# Altium PCB ICAN-7006-MCU.PcbDoc
Units mm, origin at the board's own origin, x right, y up, seen from the top; angles counter-clockwise.
Board outline 150 x 80 mm, 2 copper layers (Top Layer, Bottom Layer); 53 components, 193 nets, 552 pads, 0 vias.
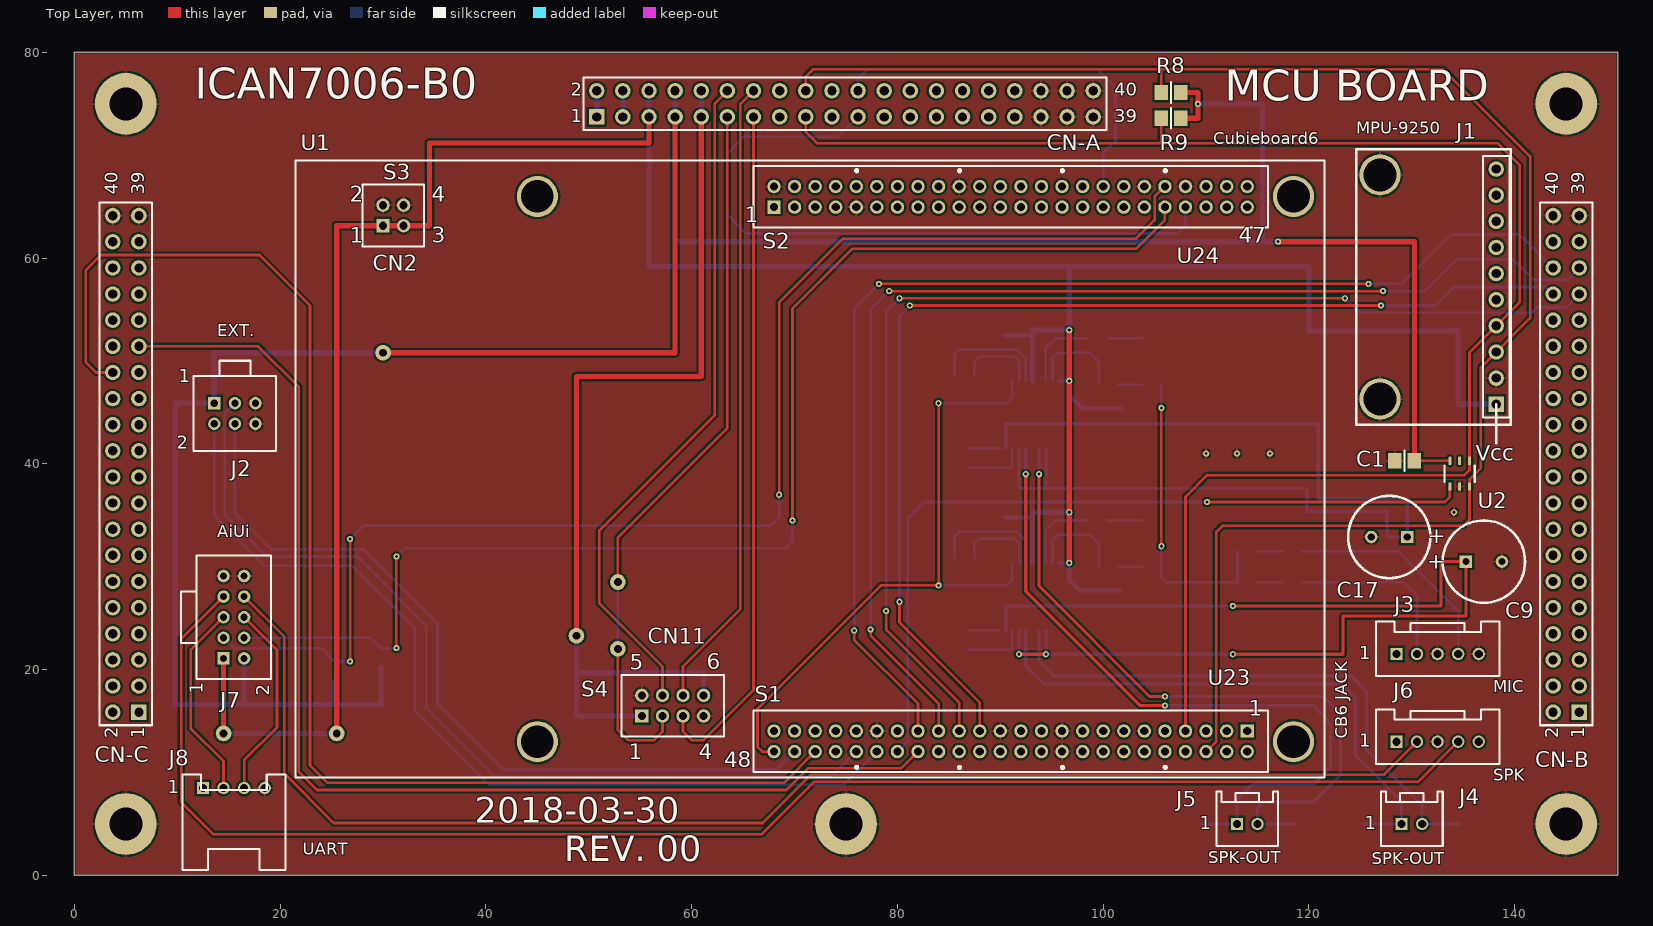
[diagram p0: Top Layer view]
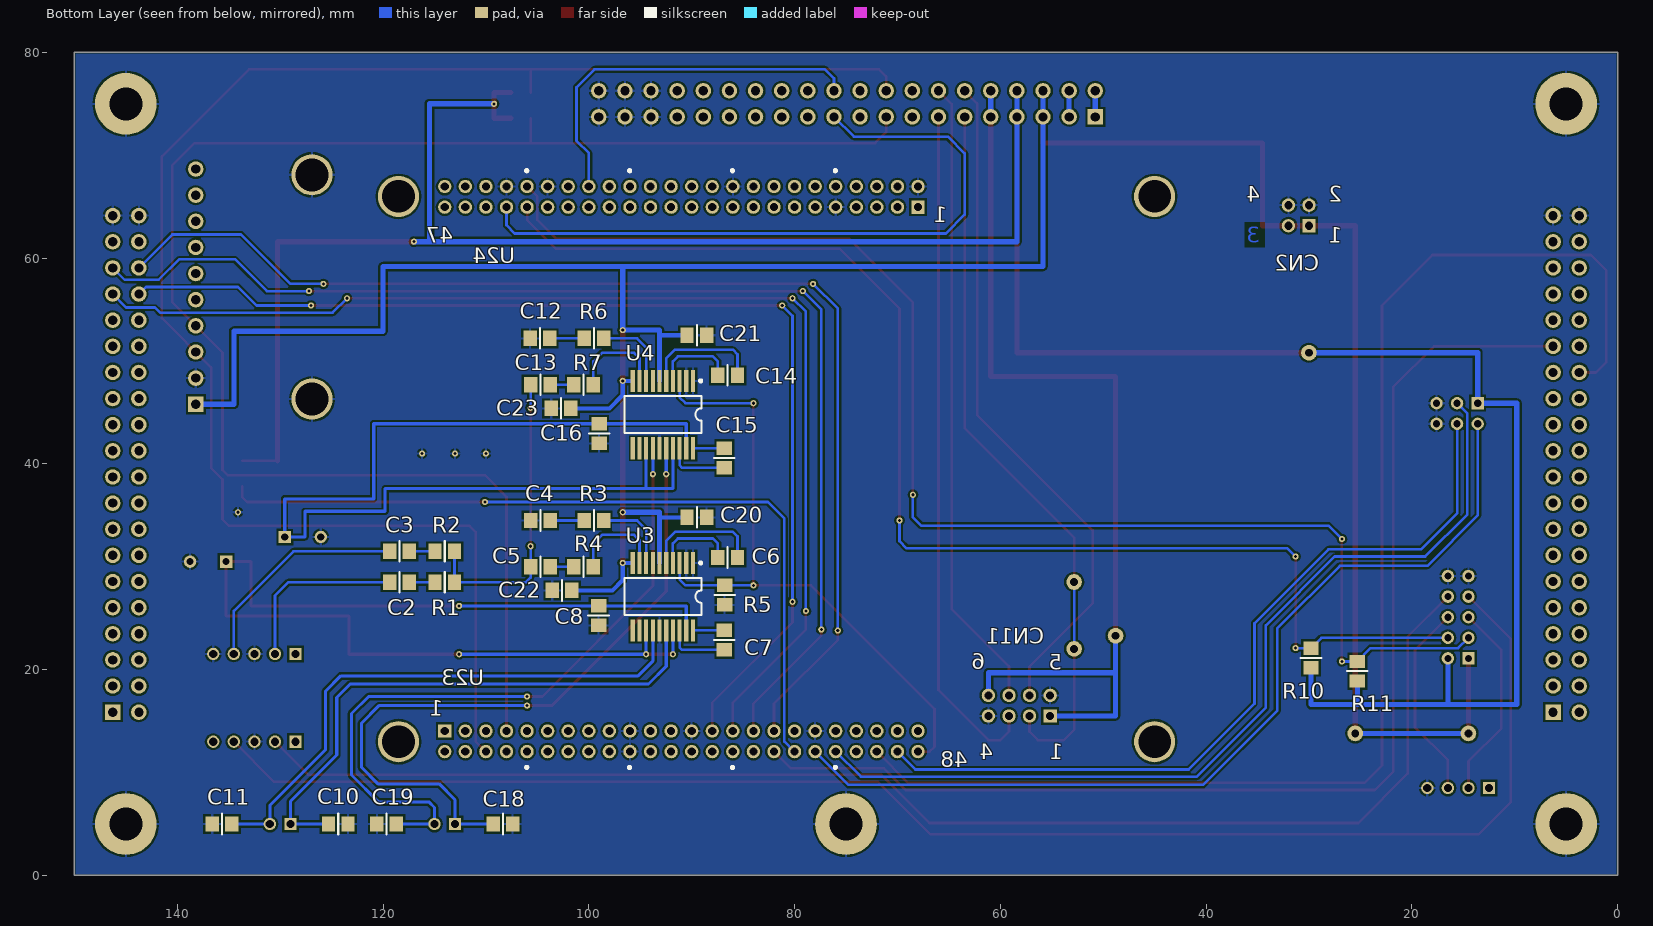
[diagram p1: Bottom Layer view, seen from below]

## Layer stack, top to bottom
Top Layer: signal copper 0.0356
Dielectric: dielectric 0.32, FR-4, Dk 4.8
Bottom Layer: signal copper 0.0356

## Board outline
0,0 0,80 150,80 150,0

## Design rules (kind name [scope] priority, off if disabled: settings)
Clearance [All] p1: gap=0.2
ComponentClearance [All] p1: gap=0.2 collisioncheckmode=3 verticalgap=0.2
HoleSize [All] p1: absolutevalues=TRUE maxlimit=8 minlimit=0.025 maxpercent=80.000 minpercent=20.000
PolygonConnect [All] p1: connectstyle=Relief reliefconductorwidth=0.254 reliefentries=4 polygonreliefangle="90 Angle"
RoutingVias [All] p1: holewidth=0.2 width=0.4 viastyle="Through Hole" minholewidth=0.2 minwidth=0.4 maxholewidth=4 maxwidth=8
SolderMaskExpansion [All] p1: expansion=0.102
TestPointUsage [All] p1: valid=0 allowmultiple=FALSE
Testpoint [All] p1: side=15 testpointundercomponent=TRUE minsize=1.016 maxsize=2.54 preferedsize=1.524 minholesize=0 maxholesize=1.016 preferedholesize=0.813 testpointgrid=0.025 style=1023 order=0-112345678
Width [All] p1: maxlimit=2 minlimit=0.2 preferedwidth=0.254
17 further rules are at their usual default settings.

## Components (designator, comment, footprint, x,y, rotation, side; value= is the part's Value field where it differs from the comment)
C1 "4.7uF" [0805]2012 129.3,40.3 r180 top
C2 "0.1uF" [0805]2012 118.4,28.5 r180 bottom
C3 "0.1uF" [0805]2012 118.4,31.5 r180 bottom
C4 "0.1uF" [0805]2012 104.7,34.5 r180 bottom
C5 "0.1uF" [0805]2012 104.7,30 r180 bottom
C6 "2.2uF" [0805]2012 86.5,30.9 r0 bottom
C7 "2.2uF" [0805]2012 86.825,22.875 r270 bottom
C8 "10uF" [0805]2012 99.05,25.25 r90 bottom
C9 "220uF/16V" "CAPA WXA PITCH 3.5MM" 137,30.5 r0 top
C10 "1uF" [0805]2012 124.35,5 r0 bottom
C11 "1uF" [0805]2012 135.65,5 r0 bottom
C12 "0.1uF" [0805]2012 104.75,52.2 r180 bottom
C13 "0.1uF" [0805]2012 104.7,47.7 r180 bottom
C14 "2.2uF" [0805]2012 86.5,48.6 r0 bottom
C15 "2.2uF" [0805]2012 86.825,40.575 r270 bottom
C16 "10uF" [0805]2012 99,42.95 r90 bottom
C17 "220uF/16V" "CAPA WXA PITCH 3.5MM" 127.8,32.9 r180 top
C18 "1uF" [0805]2012 108.35,5 r0 bottom
C19 "1uF" [0805]2012 119.65,5 r0 bottom
C20 "10uF" [0805]2012 89.5,34.8 r180 bottom
C21 "10uF" [0805]2012 89.5,52.5 r180 bottom
C22 "1uF" [0805]2012 102.6,27.7 r0 bottom
C23 "1uF" [0805]2012 102.7,45.4 r0 bottom
CN-A "25-0209-220" HDR2X20 50.77,73.73 r0 top locked
CN-B "25-0209-220" HDR2X20 146.27,15.87 r90 top locked
CN-C "25-0209-220" HDR2X20 6.27,15.87 r90 top locked
J1 "MPU-9250" HDR1X10 138.2,45.8 r90 top
J2 "PHSD 6P" "PHSD WV03X2" 15.6,44.9 r0 top
J3 "HY 5P" HY-5A 132.5,21.53 r0 top
J4 "HY 2P" HY-2A 130,5 r0 top
J5 "HY 2P" HY-2A 114,5 r0 top
J6 "HY 5P" HY-5A 132.5,13 r0 top
J7 "PHSD 10P" "PHSD WV05x2" 15.5,25.1 r90 top
J8 "HY 4P" HY-4AW 15.5,8.5 r0 top
R1 "10k" [0805]2012 114,28.5 r180 bottom
R2 "10k" [0805]2012 114,31.5 r180 bottom
R3 "0" [0805]2012 99.5,34.5 r180 bottom
R4 "0" [0805]2012 100.5,30 r180 bottom
R5 "100k" [0805]2012 86.8,27.25 r270 bottom
R6 "0" [0805]2012 99.5,52.2 r180 bottom
R7 "0" [0805]2012 100.5,47.7 r180 bottom
R8 "1k,1/8W" [0805]2012 106.6,76.1 r0 top
R9 "1k,1/8W" [0805]2012 106.6,73.6 r0 top
R10 "1k,1/8W" [0805]2012 29.8,21.15 r270 bottom
R11 "1k,1/8W" [0805]2012 25.3,19.85 r270 bottom
S1 "SOCKET 48P" "SOCKET 2.0MM X 24 DOUBLE" 91,13.04 r270 top
S2 "SOCKET 48P" "SOCKET 2.0MM X 24 DOUBLE" 91,65.96 r90 top
S3 "SOCKET 4P" "SOCKET 2.0MM X 2 DOUBLE" 31,64.15 r90 top
S4 "SOCKET 8P" "SOCKET 2.0MM X 4 DOUBLE-2" 58.16,16.5 r90 top
U1 "Cubieboard6" CUBIEBOARD6 81.75,39.5 r0 top locked
U2 "SW2001" SOP 134.65,39.05 r90 top
U3 "FT2820P" SSOP-20 92.8,27.1 r0 bottom
U4 "FT2820P" SSOP-20 92.8,44.8 r0 bottom

## Footprints (in the part's own frame and the unit in brackets; to place one, negate y for a bottom-side part, rotate by r counter-clockwise, add the part's x,y. Pads: shape width x height; smd on the part's side, far side on the other; paste and mask are expansions set on the pad)
[0805]2012 [mm] "SMD 2.0x1.25"
  rect 1.3x1.5 smd: 1(-0.95,0) 2(0.95,0)
  silkscreen extent 0,-1 0,1
"CAPA WXA PITCH 3.5MM" [mm] "Capacitor, Electrolytic, Radial; Body 8 mm (Dia); Pin Spacing 3.5 mm (typ)"
  rect 1.2x1.2 hole 0.7: 1(-1.75,0)
  round 1.2 hole 0.7: 2(1.75,0)
  silkscreen extent -4,-4 4,4
CUBIEBOARD6 [mm]
  rect 1.3x1.3 hole 0.8: CN2-1(-51.75,23.65) CN11-1(-26.59,-24) U23-1(32.25,-25.46) U24-1(-13.75,25.46)
  round 1.3 hole 0.8: CN2-2(-51.75,25.65) CN2-3(-49.75,23.65) CN2-4(-49.75,25.65) CN11-2(-24.59,-24) CN11-3(-22.59,-24) CN11-4(-20.59,-24) CN11-5(-26.59,-22) CN11-6(-24.59,-22) CN11-7(-22.59,-22) CN11-8(-20.59,-22) U23-2(32.25,-27.46) U23-3(30.25,-25.46) U23-4(30.25,-27.46) U23-5(28.25,-25.46) U23-6(28.25,-27.46) U23-7(26.25,-25.46) U23-8(26.25,-27.46) U23-9(24.25,-25.46) U23-10(24.25,-27.46) U23-11(22.25,-25.46) U23-12(22.25,-27.46) U23-13(20.25,-25.46) U23-14(20.25,-27.46) U23-15(18.25,-25.46) U23-16(18.25,-27.46) U23-17(16.25,-25.46) U23-18(16.25,-27.46) U23-19(14.25,-25.46) U23-20(14.25,-27.46) U23-21(12.25,-25.46) U23-22(12.25,-27.46) U23-23(10.25,-25.46) U23-24(10.25,-27.46) U23-25(8.25,-25.46) U23-26(8.25,-27.46) U23-27(6.25,-25.46) U23-28(6.25,-27.46) U23-29(4.25,-25.46) U23-30(4.25,-27.46) U23-31(2.25,-25.46) U23-32(2.25,-27.46) U23-33(0.25,-25.46) U23-34(0.25,-27.46) U23-35(-1.75,-25.46) U23-36(-1.75,-27.46) U23-37(-3.75,-25.46) U23-38(-3.75,-27.46) U23-39(-5.75,-25.46) U23-40(-5.75,-27.46) U23-41(-7.75,-25.46) U23-42(-7.75,-27.46) U23-43(-9.75,-25.46) U23-44(-9.75,-27.46) U23-45(-11.75,-25.46) U23-46(-11.75,-27.46) U23-47(-13.75,-25.46) U23-48(-13.75,-27.46) U24-2(-13.75,27.46) U24-3(-11.75,25.46) U24-4(-11.75,27.46) U24-5(-9.75,25.46) U24-6(-9.75,27.46) U24-7(-7.75,25.46) U24-8(-7.75,27.46) U24-9(-5.75,25.46) U24-10(-5.75,27.46) U24-11(-3.75,25.46) U24-12(-3.75,27.46) U24-13(-1.75,25.46) U24-14(-1.75,27.46) U24-15(0.25,25.46) U24-16(0.25,27.46) U24-17(2.25,25.46) U24-18(2.25,27.46) U24-19(4.25,25.46) U24-20(4.25,27.46) U24-21(6.25,25.46) U24-22(6.25,27.46) U24-23(8.25,25.46) U24-24(8.25,27.46) U24-25(10.25,25.46) U24-26(10.25,27.46) U24-27(12.25,25.46) U24-28(12.25,27.46) U24-29(14.25,25.46) U24-30(14.25,27.46) U24-31(16.25,25.46) U24-32(16.25,27.46) U24-33(18.25,25.46) U24-34(18.25,27.46) U24-35(20.25,25.46) U24-36(20.25,27.46) U24-37(22.25,25.46) U24-38(22.25,27.46) U24-39(24.25,25.46) U24-40(24.25,27.46) U24-41(26.25,25.46) U24-42(26.25,27.46) U24-43(28.25,25.46) U24-44(28.25,27.46) U24-45(30.25,25.46) U24-46(30.25,27.46) U24-47(32.25,25.46) U24-48(32.25,27.46)
  round 4 hole 3.175: ""(-36.75,-26.5) ""(-36.75,26.5) ""(36.75,-26.5) ""(36.75,26.5)
  silkscreen extent -60.25,-30 39.75,30
HDR1X10 [mm] "Connector; Header; 10 Position"
  rect 1.5x1.5 hole 0.9: 1(0,0)
  round 1.5 hole 0.9: 2(2.54,0) 3(5.08,0) 4(7.62,0) 5(10.16,0) 6(12.7,0) 7(15.24,0) 8(17.78,0) 9(20.32,0) 10(22.86,0)
  silkscreen extent -1.27,-1.27 24.13,1.27
HDR2X20 [mm] "Connector; Header; 20x2 Position"
  rect 1.5x1.5 hole 0.9: 1(0,0)
  round 1.5 hole 0.9: 2(0,2.54) 3(2.54,0) 4(2.54,2.54) 5(5.08,0) 6(5.08,2.54) 7(7.62,0) 8(7.62,2.54) 9(10.16,0) 10(10.16,2.54) 11(12.7,0) 12(12.7,2.54) 13(15.24,0) 14(15.24,2.54) 15(17.78,0) 16(17.78,2.54) 17(20.32,0) 18(20.32,2.54) 19(22.86,0) 20(22.86,2.54) 21(25.4,0) 22(25.4,2.54) 23(27.94,0) 24(27.94,2.54) 25(30.48,0) 26(30.48,2.54) 27(33.02,0) 28(33.02,2.54) 29(35.56,0) 30(35.56,2.54) 31(38.1,0) 32(38.1,2.54) 33(40.64,0) 34(40.64,2.54) 35(43.18,0) 36(43.18,2.54) 37(45.72,0) 38(45.72,2.54) 39(48.26,0) 40(48.26,2.54)
  silkscreen extent -1.27,-1.27 49.53,3.81
HY-2A [mm] "YOLINK PHB CONNECTOR A2006-xxA 2.00mm"
  rect 1.2x1.2 hole 0.8: 1(-1,0)
  round 1.2 hole 0.8: 2(1,0)
  silkscreen extent -3,-2.15 3,3.15
HY-4AW [mm] "YOLINK PHB CONNECTOR A2006-xxA 2.00mm"
  rect 1.2x1.2 hole 0.8: 1(-3,0)
  round 1.2 hole 0.8: 2(-1,0) 3(1,0) 4(3,0)
  silkscreen extent -5,-7.95 5,1.3
HY-5A [mm] "YOLINK PHB CONNECTOR A2006-xxA 2.00mm"
  rect 1.2x1.2 hole 0.8: 1(-4,0)
  round 1.2 hole 0.8: 2(-2,0) 3(0,0) 4(2,0) 5(4,0)
  silkscreen extent -6,-2.15 6,3.15
"PHSD WV03X2" [mm] "YOLINK PHSD CONNECTOR A2006-WVxxX2 2.00mm"
  rect 1.2x1.2 hole 0.7: 1(-2,1)
  round 1.2 hole 0.7: 2(-2,-1) 3(0,1) 4(0,-1) 5(2,1) 6(2,-1)
  silkscreen extent -4,-3.62 4,5.13
"PHSD WV05x2" [mm] "YOLINK PHSD CONNECTOR A2006-WVxxX2 2.00mm"
  rect 1.2x1.2 hole 0.7: 1(-4,1)
  round 1.2 hole 0.7: 2(-4,-1) 3(-2,1) 4(-2,-1) 5(0,1) 6(0,-1) 7(2,1) 8(2,-1) 9(4,1) 10(4,-1)
  silkscreen extent -6,-3.62 6,5.13
"SOCKET 2.0MM X 2 DOUBLE" [mm]
  round 1.3 hole 0.8: 1(-1,1) 2(1,1) 3(-1,-1) 4(1,-1)
  silkscreen extent -3,-3 3,3
"SOCKET 2.0MM X 4 DOUBLE-2" [mm]
  round 1.3 hole 0.8: 1(-1,3) 2(-1,1) 3(-1,-1) 4(-1,-3) 5(1,3) 6(1,1) 7(1,-1) 8(1,-3)
  silkscreen extent -3,-5 3,5
"SOCKET 2.0MM X 24 DOUBLE" [mm]
  round 1.3 hole 0.8: 1(-1,23) 2(1,23) 3(-1,21) 4(1,21) 5(-1,19) 6(1,19) 7(-1,17) 8(1,17) 9(-1,15) 10(1,15) 11(-1,13) 12(1,13) 13(-1,11) 14(1,11) 15(-1,9) 16(1,9) 17(-1,7) 18(1,7) 19(-1,5) 20(1,5) 21(-1,3) 22(1,3) 23(-1,1) 24(1,1) 25(-1,-1) 26(1,-1) 27(-1,-3) 28(1,-3) 29(-1,-5) 30(1,-5) 31(-1,-7) 32(1,-7) 33(-1,-9) 34(1,-9) 35(-1,-11) 36(1,-11) 37(-1,-13) 38(1,-13) 39(-1,-15) 40(1,-15) 41(-1,-17) 42(1,-17) 43(-1,-19) 44(1,-19) 45(-1,-21) 46(1,-21) 47(-1,-23) 48(1,-23)
  silkscreen extent -3,-25 3,25
SOP [mm] "2.926 x 1.90 pitch 0.95"
  rect 0.8x0.3 smd: 1(-1.25,0.95)
  rrect50% 0.8x0.3 smd: 2(-1.25,0) 3(-1.25,-0.95) 4(1.25,-0.95) 5(1.25,0) 6(1.25,0.95)
  silkscreen extent -0.81,-1.46 0.81,1.46
SSOP-20 [mm] "SSOP, Plastic; 20 Leads; Body Width 5.3 mm; Pitch 0.65 mm"
  rect 0.4x2.15 smd: 1(-2.925,-3.275) 2(-2.275,-3.275) 3(-1.625,-3.275) 4(-0.975,-3.275) 5(-0.325,-3.275) 6(0.325,-3.275) 7(0.975,-3.275) 8(1.625,-3.275) 9(2.275,-3.275) 10(2.925,-3.275) 11(2.925,3.275) 12(2.275,3.275) 13(1.625,3.275) 14(0.975,3.275) 15(0.325,3.275) 16(-0.325,3.275) 17(-0.975,3.275) 18(-1.625,3.275) 19(-2.275,3.275) 20(-2.925,3.275)
  silkscreen extent -3.8,-3.4 3.75,1.8

## Part data
C1: library part Cap, "Capacitor"
C2 C3 C4 C5 C6 C7 C8 C10 C11 C12 C13 C14 C15 C16 C18 C19 C20 C21: library part "Cap Semi", "Capacitor (Semiconductor SIM Model)"
C9 C17: library part "Cap Pol2", "Polarized Capacitor (Axial)"
C22 C23: library part "Cap Semi", "Capacitor"
CN-A CN-B: library part "Header 25X2", "Header, 25-Pin, Dual row"
CN-C: library part "Header 20X2", "Header, 20-Pin, Dual row"
J1 J7: library part "Header 10", "Header, 10-Pin"
J2: library part "Header 6", "Header, 6-Pin"
J3 J5 J6: library part "Header 5", "Header, 5-Pin"
J4: library part "Header 2", "Header, 2-Pin"
J8: library part "Header 4", "Header, 4-Pin"
R1 R2 R3 R4 R5 R6 R7 R8 R9 R10 R11: library part Res3, "Resistor"
S3 S4: "SOCKET"
U2: library part IC6-WIDE
U3 U4: library part IC20

## Free pads (board coordinates)
  round 6 hole 3.2: 0(5,5) 0(5,75) 0(75,5) 0(145,5) 0(145,75)
  round 4 hole 3.2: 0(126.9,46.3) 0(126.9,68.1)
  round 1.524 hole 0.762: 2(52.829,28.522) 3(14.5,13.8) 3(25.5,13.8) 3(30,50.8) 3(48.8,23.3) 3(52.829,22.019)
  round 0.6 hole 0.3: 3(26.8,32.7) 3(26.8,20.8) 3(31.3,22.1) 3(31.3,31) 3(68.5,37) 3(69.8,34.5) 3(75.8,23.8) 3(77.4,23.9) 3(78.2,57.5) 3(78.9,25.7) 3(79.2,56.8) 3(80.2,26.6) 3(80.2,56.1) 3(81.2,55.4) 3(84,28.2) 3(84,45.9) 3(91.825,21.5) 3(92.475,39) 3(93.775,39) 3(94.425,21.5) 3(96.7,48.075) 3(96.7,53) 3(96.7,30.375) 3(96.7,35.3) 3(105.65,45.45) 3(105.65,32) 3(106,16.5) 3(106,17.4) 3(109.2,75) 3(110,41) 3(110.1,36.3) 3(112.6,21.5) 3(112.6,26.2) 3(113,41) 3(116.2,41) 3(117,61.6) 3(123.5,56.1) 3(125.8,57.5) 3(127,55.4) 3(127.2,56.8) 3(134.1,35.3)

## Nets (pads, with @x,y where several pads share a name; then routed paths per layer and width w, separated by ;. In a path a pad name is that pad's centre, name@x,y a point inside that pad or via, vN(x,y) a via of type N, cw(c..) or ccw(c..) an arc to the next point about the centre after c; other vN are vias at no path point)
*LIGHT_ON: CN-A.33
*MF-DIR: CN-B.3
*MF-ENB: CN-B.5
*MIC: J6.5
*ML-ALM: CN-C.8
*ML-BRAKE: CN-B.10
*ML-ENB: CN-B.12
*ML-F/*R: CN-B.8
*ML-PG: CN-C.6
*MLL-PG_B: CN-C.12
*MLL-PG_F: CN-C.10
*MLR-PG_B: CN-C.11
*MLR-PG_F: CN-C.9
*MOTOR_ON1: CN-A.29
*MOTOR_ON2: CN-A.31
*MR-ALM: CN-C.7
*MR-BRAKE: CN-B.9
*MR-ENB: CN-B.11
*MR-F/*R: CN-B.7
*MR-PG: CN-C.5
*SNS-COVER: CN-C.19
*SNS-HOME_C: CN-C.3
*SNS-HOME_L: CN-C.2
*SNS-HOME_R: CN-C.1
*SNS-MIC_CLOSE: CN-C.4
*SNS-RAIN: CN-C.30
*SW-A/*M: CN-C.28 S1.44 U1.U23-44 | length 132.2
  Top Layer w0.254: CN-C.28 2.11,48.89 1.1,49.9 1.1,58.8 2.6,60.3 18,60.3 22.9,55.4 22.9,10.7 24.6,9 68.96,9 U1.U23-44
*SW-BRAKE: CN-C.27
*SW-EMERGENCY: CN-A.25
*SW-LUG-B_OR: CN-C.24
*SW-LUG-B_POS: CN-C.22
*SW-LUG-CENTER: CN-C.20
*SW-LUG-F_OR: CN-C.23
*SW-LUG-F_POS: CN-C.21
*SW-LUG_DN: CN-C.34
*SW-LUG_UP: CN-C.32
*SW-MLL_CLOSE: CN-C.16
*SW-MLL_OPEN: CN-C.18
*SW-MLR_CLOSE: CN-C.15
*SW-MLR_OPEN: CN-C.17
*SW-SEAT: CN-C.29 S1.34 U1.U23-34 | length 117.1
  Top Layer w0.254: CN-C.29 17.87,51.43 21.8,47.5 21.8,10.1 23.6,8.3 69.2,8.3 71.3,10.4 80.36,10.4 U1.U23-34
*SW_CLOSE: CN-C.26
*SW_FORWORD: CN-C.31
*SW_OPEN: CN-C.25
AD-48V: CN-C.13
AD-ACC: CN-C.14
AD-TEMP: CN-C.33
DC3.3V: C1.1 CN-A.7 CN-A.8 J2.1 J7.2 pad.3@30,50.8 pad.3@109.2,75 pad.3@117,61.6 R8.2 R9.2 R10.2 R11.2 U2.6 | length 272.9
  Top Layer w0.254: C1.1 U2.6
  Top Layer w0.5: pad.3@30,50.8 58.39,50.8 CN-A.7 ; R9.2 109.2,73.6 109.2,76.1 R8.2 ; pad.3@117,61.6 130.25,61.6 C1.1
  Bottom Layer w0.5: 16.5,16.6 J7.2 ; 25.3,16.6 R11.2 ; R10.2 29.8,16.6 9.8,16.6 9.8,45.9 J2.1 13.6,50.8 pad.3@30,50.8 ; CN-A.8 58.39,61.6 pad.3@117,61.6 ; pad.3@109.2,75 115.5,75 115.5,61.6
DC5V: C20.1 C21.1 C22.1 C23.1 CN-A.5 CN-A.6 J1.1 J7.1 pad.3@14.5,13.8 pad.3@25.5,13.8 pad.3@96.7,30.375 pad.3@96.7,35.3 pad.3@96.7,48.075 pad.3@96.7,53 S3.1 S3.3 U1.CN2-1 U1.CN2-3 U3.6 U3.10 U4.6 U4.10 | length 288.5
  Top Layer w0.5: pad.3@14.5,13.8 J7.1 ; pad.3@25.5,13.8 25.5,63.15 34.5,63.15 34.5,71.2 55.85,71.2 CN-A.5 ; pad.3@96.7,30.375 pad.3@96.7,53
  Bottom Layer w0.4: C20.1 93.125,34.8 ; C21.1 93.125,52.5 ; U3.10 96.7,30.375 96.7,28.7 97.7,27.7 C22.1 ; U4.10 96.7,48.075 96.7,46.7 98,45.4 C23.1
  Bottom Layer w0.5: pad.3@14.5,13.8 pad.3@25.5,13.8 ; CN-A.6 55.85,59.2 120,59.2 120,52.9 134.5,52.9 134.5,45.8 J1.1 ; U3.6 93.125,35.3 pad.3@96.7,35.3 ; U4.6 93.125,53 96.7,53 96.7,59.2
DC12V: CN-A.3 CN-A.4 | length 2.5
  Bottom Layer w0.5: CN-A.3 CN-A.4
DC24V: CN-A.1 CN-A.2 | length 2.5
  Bottom Layer w0.5: CN-A.1 CN-A.2
GND: C1.2 C4.1 C8.1 C9.2 C10.1 C11.2 C12.1 C16.1 C17.2 C18.1 C19.2 C20.2 C21.2 C22.2 C23.2 CN-A.35 CN-A.36 CN-A.37 CN-A.38 CN-A.39 CN-A.40 CN-B.39 CN-B.40 CN-C.39 CN-C.40 J1.2 J2.5 J2.6 J3.3 J3.5 J6.3 J7.9 J7.10 J8.4 pad.0 pad.3@110,41 pad.3@113,41 pad.3@116.2,41 pad.3@134.1,35.3 R5.2 S1.19 S1.20 S1.25 S1.37 S2.2 S2.9 S2.20 S2.38 S2.42 S3.2 S3.4 S4.4 S4.5 U1.CN2-2 U1.CN2-4 U1.CN11-4 U1.CN11-5 U1.U23-19 U1.U23-20 U1.U23-25 U1.U23-37 U1.U24-2 U1.U24-9 U1.U24-20 U1.U24-38 U1.U24-42 U2.2 U3.1 U3.2 U3.15 U4.1 U4.2 U4.15
I2C_SCL: CN-A.18 J1.3 R8.1 S1.6 U1.U23-6 U2.3 | length 162.5
  Top Layer w0.254: CN-A.18 71.09,77.669 71.778,78.356 133.044,78.356 141.5,69.9 141.5,54.18 136.7,49.38 136.7,39.6 135.6,38.5 135.6,34.6 134.973,33.973 111.573,33.973 111,33.4 111,13.04 U1.U23-6 ; R8.1 105.65,78.356
I2C_SCL2: J7.3 pad.3@26.8,20.8 pad.3@26.8,32.7 pad.3@68.5,37 R11.1 S2.40 U1.U24-40 | length 132.1
  Top Layer w0.254: pad.3@26.8,20.8 pad.3@26.8,32.7 ; pad.3@68.5,37 68.5,55.7 74.7,61.9 103.2,61.9 105,63.7 105,66 105.96,66.96 U1.U24-40
  Bottom Layer w0.254: J7.3 15.5,22.1 24,22.1 R11.1 pad.3@26.8,20.8 ; pad.3@26.8,32.7 28.1,34 67.7,34 68.5,34.8 pad.3@68.5,37
I2C_SDA: CN-A.17 J1.4 R9.1 S1.7 U1.U23-7 U2.4 | length 157.7
  Top Layer w0.254: CN-A.17 71.09,72.262 72.184,71.168 138.332,71.168 140.5,69 140.5,55.72 135.6,50.82 135.6,39.4 135.1,38.9 110.1,38.9 108,36.8 U1.U23-7 ; 105.65,71.168 R9.1
I2C_SDA2: J7.4 pad.3@31.3,22.1 pad.3@31.3,31 pad.3@69.8,34.5 R10.1 S2.39 U1.U24-39 | length 126.9
  Top Layer w0.254: pad.3@31.3,22.1 pad.3@31.3,31 ; pad.3@69.8,34.5 69.8,55.1 75.6,60.9 103.2,60.9 106,63.7 U1.U24-39
  Bottom Layer w0.254: J7.4 28.8,23.1 R10.1 pad.3@31.3,22.1 ; pad.3@31.3,31 32.1,31.8 69.1,31.8 69.8,32.5 pad.3@69.8,34.5
LUG-BRAKE: CN-B.23
LUG-PWM1: CN-B.19
LUG-PWM2: CN-B.21
MF-PWM: CN-B.1
MIC: J6.1
MIC-L: J6.4 J7.7 | length 150.8
  Top Layer w0.254: J7.7 10.375,22.975 10.375,7.148 13.523,4 66.8,4 71.9,9.1 130.6,9.1 J6.4
MIC-MOTOR: CN-B.25
MIC-R: J6.2 J7.8 | length 134.2
  Top Layer w0.254: J7.8 20.4,23.2 20.4,9.9 25.2,5.1 66.9,5.1 71.6,9.8 127.3,9.8 J6.2
MICIN: J3.1
ML-PWM: CN-B.14
MLL-PWM1: CN-B.16
MLL-PWM2: CN-B.18
MLR-PWM1: CN-B.15
MLR-PWM2: CN-B.17
MR-PWM: CN-B.13
NetC2_2: C2.2 R1.1 | length 2.5
  Bottom Layer w0.254: R1.1 C2.2
NetC3_2: C3.2 R2.1 | length 2.5
  Bottom Layer w0.254: R2.1 C3.2
NetC4_2: C4.2 R3.1 | length 3.3
  Bottom Layer w0.254: R3.1 C4.2
NetC5_1: C5.1 C13.1 pad.3@105.65,32 pad.3@105.65,45.45 R1.2 R2.2 | length 29.3
  Top Layer w0.254: pad.3@105.65,32 pad.3@105.65,45.45
  Bottom Layer w0.254: pad.3@105.65,32 105.65,28.95 106.1,28.5 R1.2 R2.2 ; pad.3@105.65,45.45 C13.1
NetC5_2: C5.2 R4.1 | length 2.3
  Bottom Layer w0.254: R4.1 C5.2
NetC6_1: C6.1 U3.5 | length 11.7
  Bottom Layer w0.254: C6.1 85.55,32.95 86,33.4 91.6,33.4 92.475,32.525 U3.5
NetC6_2: C6.2 U3.4 | length 8
  Bottom Layer w0.254: C6.2 87.45,32.25 87.95,32.75 91.35,32.75 91.825,32.275 U3.4
NetC7_1: C7.1 U3.20 | length 3.1
  Bottom Layer w0.254: C7.1 U3.20
NetC7_2: C7.2 U3.18 | length 6.1
  Bottom Layer w0.254: C7.2 90.925,21.925 91.175,22.175 U3.18
NetC8_2: C8.2 C9.1 pad.3@91.825,21.5 pad.3@94.425,21.5 pad.3@112.6,21.5 pad.3@112.6,26.2 U3.13 U3.17 U3.19 | length 108.5
  Top Layer w0.3: pad.3@91.825,21.5 pad.3@94.425,21.5 ; pad.3@112.6,21.5 123.3,21.5 123.3,25.2 135.25,25.2 C9.1 132.825,30.5 132.825,26.2 pad.3@112.6,26.2
  Bottom Layer w0.3: U3.19 90.525,26.2 pad.3@112.6,26.2 ; pad.3@91.825,21.5 U3.17 ; U3.13 94.425,21.5 pad.3@112.6,21.5
NetC10_2: C10.2 J4.1 U3.16 | length 54.6
  Bottom Layer w0.3: U3.16 92.475,20.325 94.2,18.6 123.2,18.6 124.5,17.3 124.5,11.7 129,7.2 J4.1 C10.2
NetC11_1: C11.1 J4.2 U3.14 | length 54.9
  Bottom Layer w0.3: U3.14 93.775,20.825 95.2,19.4 124.1,19.4 125.593,17.907 125.593,12.207 131,6.8 J4.2 C11.1
NetC12_2: C12.2 R6.1 | length 3.3
  Bottom Layer w0.254: R6.1@100.5,52.2 C12.2
NetC13_2: C13.2 R7.1 | length 2.3
  Bottom Layer w0.254: R7.1 C13.2
NetC14_1: C14.1 U4.5 | length 11.7
  Bottom Layer w0.254: C14.1 85.55,50.65 86,51.1 91.6,51.1 92.475,50.225 U4.5
NetC14_2: C14.2 U4.4 | length 8
  Bottom Layer w0.254: C14.2 87.45,49.95 87.95,50.45 91.35,50.45 91.825,49.975 U4.4
NetC15_1: C15.1 U4.20 | length 3.1
  Bottom Layer w0.254: C15.1 U4.20
NetC15_2: C15.2 U4.18 | length 8.1
  Bottom Layer w0.254: C15.2 90.925,39.625 ; 90.925,39.625 91.175,39.875 ; 90.925,39.625 91.175,39.875 ; 91.175,39.875 U4.18 91.175,39.875
NetC16_2: C16.2 C17.1 U4.13 U4.17 U4.19 | length 102.7
  Bottom Layer w0.3: U4.19 90.525,43.9 120.9,43.9 120.9,36.6 129.55,36.6 C17.1 127.6,32.9 127.6,35.4 119.8,35.4 119.8,37.6 91.825,37.6 U4.17 ; 94.425,37.6 U4.13
NetC18_2: C18.2 J5.1 pad.3@92.475,39 pad.3@106,16.5 U4.16 | length 69.6
  Top Layer w0.3: pad.3@92.475,39 92.475,27.625 103.6,16.5 pad.3@106,16.5
  Bottom Layer w0.3: pad.3@92.475,39 U4.16 ; pad.3@106,16.5 120.4,16.5 122.1,14.8 122.1,10.5 120.5,8.9 114.55,8.9 113,7.35 J5.1 C18.2
NetC19_1: C19.1 J5.2 pad.3@93.775,39 pad.3@106,17.4 U4.14 | length 68.5
  Top Layer w0.3: pad.3@93.775,39 93.775,28.125 104.5,17.4 pad.3@106,17.4
  Bottom Layer w0.3: pad.3@93.775,39 U4.14 ; pad.3@106,17.4 121.4,17.4 123.057,15.743 123.057,9.757 120.45,7.15 115.55,7.15 115,6.6 J5.2 C19.1
NetJ2_2: J2.2 S1.38 U1.U23-38 | length 90.2
  Bottom Layer w0.254: J2.2 13.6,35 18.5,30.1 27,30.1 33.1,24 33.1,16 40.3,8.8 74.76,8.8 U1.U23-38
NetJ2_3: J2.3 S1.40 U1.U23-40 | length 88.9
  Bottom Layer w0.254: J2.3 14.6,44.9 14.6,35.1 18.7,31 27.5,31 34.2,24.3 34.2,16.3 40.9,9.6 73.56,9.6 U1.U23-40
NetJ2_4: J2.4 S1.46 U1.U23-46 | length 78.7
  Bottom Layer w0.254: J2.4 15.6,35.2 19.1,31.7 28.1,31.7 35.3,24.5 35.3,16.7 41.7,10.3 68.26,10.3 U1.U23-46
NetR3_2: R3.2 U3.8 | length 7.7
  Bottom Layer w0.254: U3.8 94.425,33.625 95.3,34.5 R3.2
NetR4_2: R4.2 U3.9 | length 9.5
  Bottom Layer w0.254: U3.9 95.075,32.575 95.6,33.1 98.7,33.1 99.55,32.25 R4.2
NetR6_2: R6.2 U4.8 | length 7.7
  Bottom Layer w0.254: U4.8 94.425,51.325 95.3,52.2 R6.2
NetR7_2: R7.2 U4.9 | length 9.5
  Bottom Layer w0.254: U4.9 95.075,50.275 95.6,50.8 98.7,50.8 99.55,49.95 R7.2
NetS1_1: S1.1 U1.U23-1
NetS1_2: S1.2 U1.U23-2
NetS1_3: S1.3 U1.U23-3
NetS1_4: S1.4 U1.U23-4
NetS1_5: S1.5 U1.U23-5
NetS1_8: S1.8 U1.U23-8
NetS1_9: S1.9 U1.U23-9
NetS1_10: S1.10 U1.U23-10
NetS1_11: S1.11 U1.U23-11
NetS1_12: S1.12 U1.U23-12
NetS1_13: S1.13 U1.U23-13
NetS1_14: S1.14 U1.U23-14
NetS1_15: S1.15 U1.U23-15
NetS1_16: S1.16 U1.U23-16
NetS1_17: S1.17 U1.U23-17
NetS1_18: S1.18 U1.U23-18
NetS1_21: S1.21 U1.U23-21
NetS1_22: S1.22 U1.U23-22
NetS1_23: S1.23 U1.U23-23
NetS1_24: S1.24 U1.U23-24
NetS1_26: S1.26 U1.U23-26
NetS1_28: S1.28 U1.U23-28
NetS1_30: S1.30 U1.U23-30
NetS1_32: S1.32 U1.U23-32
NetS1_35: S1.35 U1.U23-35
NetS1_39: S1.39 U1.U23-39
NetS1_41: S1.41 U1.U23-41
NetS1_42: S1.42 U1.U23-42
NetS1_43: S1.43 U1.U23-43
NetS1_45: S1.45 U1.U23-45
NetS1_47: S1.47 U1.U23-47
NetS2_1: S2.1 U1.U24-1
NetS2_3: S2.3 U1.U24-3
NetS2_4: S2.4 U1.U24-4
NetS2_5: S2.5 U1.U24-5
NetS2_6: S2.6 U1.U24-6
NetS2_7: S2.7 U1.U24-7
NetS2_8: S2.8 U1.U24-8
NetS2_10: S2.10 U1.U24-10
NetS2_11: S2.11 U1.U24-11
NetS2_12: S2.12 U1.U24-12
NetS2_13: S2.13 U1.U24-13
NetS2_14: S2.14 U1.U24-14
NetS2_15: S2.15 U1.U24-15
NetS2_16: S2.16 U1.U24-16
NetS2_17: S2.17 U1.U24-17
NetS2_18: S2.18 U1.U24-18
NetS2_19: S2.19 U1.U24-19
NetS2_21: S2.21 U1.U24-21
NetS2_22: S2.22 U1.U24-22
NetS2_23: S2.23 U1.U24-23
NetS2_24: S2.24 U1.U24-24
NetS2_25: S2.25 U1.U24-25
NetS2_26: S2.26 U1.U24-26
NetS2_27: S2.27 U1.U24-27
NetS2_28: S2.28 U1.U24-28
NetS2_29: S2.29 U1.U24-29
NetS2_30: S2.30 U1.U24-30
NetS2_31: S2.31 U1.U24-31
NetS2_32: S2.32 U1.U24-32
NetS2_33: S2.33 U1.U24-33
NetS2_35: S2.35 U1.U24-35
NetS2_36: S2.36 U1.U24-36
NetS2_37: S2.37 U1.U24-37
NetS2_43: S2.43 U1.U24-43
NetS2_44: S2.44 U1.U24-44
NetS2_45: S2.45 U1.U24-45
NetS2_46: S2.46 U1.U24-46
NetS2_47: S2.47 U1.U24-47
NetS2_48: S2.48 U1.U24-48
PCM-CK: CN-B.35 pad.3@77.4,23.9 pad.3@79.2,56.8 pad.3@127.2,56.8 S1.31 U1.U23-31 | length 115.9
  Top Layer w0.254: pad.3@77.4,23.9 77.4,23.3 84,16.7 U1.U23-31 ; pad.3@79.2,56.8 pad.3@127.2,56.8
  Bottom Layer w0.254: pad.3@77.4,23.9 77.4,55 pad.3@79.2,56.8 ; pad.3@127.2,56.8 131.3,56.8 134.4,59.9 139.8,59.9 141.8,57.9 145.12,57.9 CN-B.35
PCM-DI: CN-B.34 pad.3@80.2,26.6 pad.3@81.2,55.4 pad.3@127,55.4 S1.27 U1.U23-27 | length 108.6
  Top Layer w0.254: pad.3@80.2,26.6 80.2,24.6 88,16.8 U1.U23-27 ; pad.3@81.2,55.4 pad.3@127,55.4
  Bottom Layer w0.254: pad.3@80.2,26.6 80.2,54.4 pad.3@81.2,55.4 ; pad.3@127,55.4 132.3,55.4 134.1,57.2 143.04,57.2 CN-B.34
PCM-DO: CN-B.33 pad.3@78.9,25.7 pad.3@80.2,56.1 pad.3@123.5,56.1 S1.29 U1.U23-29 | length 112.9
  Top Layer w0.254: pad.3@78.9,25.7 78.9,23.9 86,16.8 U1.U23-29 ; pad.3@80.2,56.1 pad.3@123.5,56.1
  Bottom Layer w0.254: pad.3@78.9,25.7 78.9,54.8 pad.3@80.2,56.1 ; pad.3@123.5,56.1 124.9,54.7 141.66,54.7 142.16,55.2 144.96,55.2 CN-B.33
PCM-SYNC: CN-B.36 pad.3@75.8,23.8 pad.3@78.2,57.5 pad.3@125.8,57.5 S1.33 U1.U23-33 | length 115.9
  Top Layer w0.254: pad.3@75.8,23.8 75.8,22.9 82,16.7 U1.U23-33 ; pad.3@78.2,57.5 pad.3@125.8,57.5
  Bottom Layer w0.254: pad.3@75.8,23.8 75.8,55.1 pad.3@78.2,57.5 ; pad.3@125.8,57.5 129,57.5 133.8,62.3 140.48,62.3 CN-B.36
SECURE_FLAG: pad.3@110.1,36.3 S1.36 U1.U23-36 U2.1 | length 77.7
  Top Layer w0.254: U1.U23-36 U1.U23-36@80.036,12.04 ; pad.3@110.1,36.3 133.2,36.3 133.7,36.8 U2.1
  Bottom Layer w0.254: U1.U23-36@80.036,12.04 81,13.004 81,34.7 82.6,36.3 pad.3@110.1,36.3
SNS-BRAKE_CURR: CN-C.36
SNS-LUG-CURR: CN-C.37
SNS-MLL_CURR: CN-C.38
SNS-MLR_CURR: CN-C.35
SPK-L: C3.1 J3.4 | length 21.7
  Bottom Layer w0.254: C3.1 128.7,31.5 134.5,25.7 J3.4
SPK-R: C2.1 J3.2 | length 17.4
  Bottom Layer w0.254: C2.1 129.2,28.5 130.5,27.2 J3.2
SPK_ENB: pad.3@84,28.2 pad.3@84,45.9 R5.1 S1.48 U1.U23-48 U3.3 U4.3 | length 63.8
  Top Layer w0.254: U1.U23-48 66.86,12.04 66.4,12.5 66.4,16.2 78.4,28.2 84,28.2 pad.3@84,45.9
  Bottom Layer w0.254: pad.3@84,28.2 90.6,28.2 91.175,28.775 U3.3 ; pad.3@84,45.9 90.6,45.9 91.175,46.475 U4.3
UART1-RXD: J7.5 J8.2 | length 19.3
  Top Layer w0.254: J8.2 14.5,11.1 11.3,14.3 11.3,21.9 J7.5
UART1-TXD: J7.6 J8.3 | length 19.3
  Top Layer w0.254: J8.3 16.5,11.2 19.7,14.4 19.7,21.9 J7.6
UART-CB_RX: CN-A.22 S2.34 U1.U24-34 | length 37.5
  Bottom Layer w0.254: CN-A.22 76.17,77.47 77.056,78.356 99.444,78.356 101.2,76.6 101.2,71.4 100,70.2 U1.U24-34
UART-CB_TX: CN-A.21 S2.41 U1.U24-41 | length 67.5
  Bottom Layer w0.254: CN-A.21 74.24,71.8 65.1,71.8 63.47,70.17 63.47,64.23 65.3,62.4 107.2,62.4 108,63.2 U1.U24-41
US_EMG: CN-A.26
US_POWER: CN-A.32
USB_5V: CN-A.9 CN-A.10 pad.3@48.8,23.3 S4.1 S4.8 U1.CN11-1 U1.CN11-8 | length 93.8
  Top Layer w0.5: pad.3@48.8,23.3 48.8,48.5 60.93,48.5 CN-A.9
  Bottom Layer w0.5: 48.8,19.7 61.16,19.7 U1.CN11-8 ; pad.3@48.8,23.3 48.8,15.5 U1.CN11-1 ; CN-A.9 CN-A.10
USB_DM1: CN-A.11 pad.2 pad.3@52.829,22.019 S4.2 U1.CN11-2 | length 70.7
  Top Layer w0.254: pad.3@52.829,22.019 52.829,14.145 53.82,13.155 56.335,13.155 57.16,13.98 U1.CN11-2 U1.CN11-2@57.232,15.5 ; pad.2 52.829,32.829 63.47,43.47 CN-A.11
  Bottom Layer w0.254: pad.3@52.829,22.019 pad.2
USB_DM2: CN-A.12 S4.6 U1.CN11-6 | length 66.5
  Top Layer w0.254: U1.CN11-6 57.16,20.305 51.026,26.439 51.026,33.526 62.253,44.753 62.253,75.053 CN-A.12
USB_DP1: CN-A.13 S4.3 U1.CN11-3 | length 66.4
  Top Layer w0.254: U1.CN11-3 59.16,13.987 59.992,13.155 61.155,13.155 66.01,18.01 CN-A.13
USB_DP2: CN-A.14 S4.7 U1.CN11-7 | length 61.6
  Top Layer w0.254: U1.CN11-7 59.16,20.323 64.74,25.903 64.74,75 CN-A.14
USB_POWER: CN-A.30
pads on no net: CN-A.15 CN-A.16 CN-A.19 CN-A.20 CN-A.23 CN-A.24 CN-A.27 CN-A.28 CN-A.34 CN-B.2 CN-B.4 CN-B.6 CN-B.20 CN-B.22 CN-B.24 CN-B.26 CN-B.27 CN-B.28 CN-B.29 CN-B.30 CN-B.31 CN-B.32 CN-B.37 CN-B.38 J1.5 J1.6 J1.7 J1.8 J1.9 J1.10 J8.1 U1. U2.5 U3.7 U3.11 U3.12 U4.7 U4.11 U4.12

## Polygon pours and split planes (outlines as drawn)
GND on Top Layer "Top Layer-No Net" (solid, pour order 1001): 0.127,0.127 149.873,0.127 149.873,79.873 0.127,79.873
GND on Bottom Layer "Bottom Layer-No Net" (solid, pour order 1000): 0.127,0.127 149.873,0.127 149.873,79.873 0.127,79.873

## Silkscreen, mask and mechanical layers (free items; w line width, h text height)
Top Overlay:
  lines w0.254: 138.2,42 138.2,45.8 ; 124.6,43.8 139.6,43.8 139.6,70.6 124.6,70.6 124.6,43.8
  text "ICAN7006-B0" at 11.7,75.5 h3
  text "MCU BOARD" at 111.8,75.3 h3
  text "MPU-9250" at 124.6,71.7 h2
  text "Cubieboard6" at 110.7,70.7 h2
  text "EXT." at 13.9,52 h2
  text "Vcc" at 136.2,40.3 h1.52
  text "AiUi" at 13.9,32.5 h2
  text "MIC" at 137.9,17.4 h2
  text "CB6 JACK" at 124.1,13.3 h2 r90
  text "SPK" at 137.9,8.8 h2
  text "2018-03-30" at 38.9,5.1 h2.5
  text "UART" at 22.2,1.6 h2
  text "REV. 00" at 47.6,1.4 h2.5
  text "SPK-OUT" at 110.2,0.8 h2
  text "SPK-OUT" at 126.1,0.7 h2
Mechanical 13:
  the board outline again, w0.254

## Text inside footprints (layer, text, board x,y; h text height)
C9: Top Overlay "+" at 131.5,29.8 h1.52
C17: Top Overlay "+" at 133.3,33.6 h1.52 r180
CN-A: Top Overlay "39" at 101.062,73.222 h1.27; Top Overlay "40" at 101.062,75.762 h1.27; Top Overlay "2" at 48.23,75.762 h1.27; Top Overlay "1" at 48.23,73.222 h1.27
CN-B: Top Overlay "39" at 146.778,66.162 h1.27 r90; Top Overlay "40" at 144.238,66.162 h1.27 r90; Top Overlay "2" at 144.238,13.33 h1.27 r90; Top Overlay "1" at 146.778,13.33 h1.27 r90
CN-C: Top Overlay "39" at 6.778,66.162 h1.27 r90; Top Overlay "40" at 4.238,66.162 h1.27 r90; Top Overlay "2" at 4.238,13.33 h1.27 r90; Top Overlay "1" at 6.778,13.33 h1.27 r90
J2: Top Overlay "1" at 10.15,47.925 h1.27; Top Overlay "2" at 9.95,41.475 h1.27
J3: Top Overlay "1" at 124.9,21.03 h1.27
J4: Top Overlay "1" at 125.4,4.5 h1.27
J5: Top Overlay "1" at 109.4,4.5 h1.27
J6: Top Overlay "1" at 124.9,12.5 h1.27
J7: Top Overlay "2" at 18.925,17.45 h1.27 r90; Top Overlay "1" at 12.475,17.65 h1.27 r90
J8: Top Overlay "1" at 9.1,8 h1.27
U1: Bottom Layer "3" at 34.75,61.5 h1.52; Top Overlay "U24" at 107.16,59.5 h1.52; Top Overlay "U23" at 110.16,18.5 h1.52; Top Overlay "1" at 114.16,15.5 h1.52; Top Overlay "48" at 63.16,10.5 h1.52; Top Overlay "1" at 26.75,61.5 h1.52; Top Overlay "47" at 113.16,61.5 h1.52; Top Overlay "1" at 53.9,11.3 h1.52; Top Overlay "5" at 54,20 h1.52; Top Overlay "6" at 61.484,20.024 h1.52; Top Overlay "4" at 60.7,11.3 h1.52; Top Overlay "CN2" at 29.004,58.754 h1.52; Top Overlay "3" at 34.75,61.5 h1.52; Top Overlay "4" at 34.75,65.5 h1.52; Top Overlay "1" at 65.16,63.5 h1.52; Top Overlay "CN11" at 55.75,22.5 h1.52; Top Overlay "2" at 26.75,65.5 h1.52; Bottom Overlay "1" at 65.16,63.5 h1.52; Bottom Overlay "CN11" at 55.75,22.5 h1.52; Bottom Overlay "4" at 34.75,65.5 h1.52; Bottom Overlay "CN2" at 29.004,58.754 h1.52; Bottom Overlay "1" at 26.75,61.5 h1.52; Bottom Overlay "2" at 26.75,65.5 h1.52; Bottom Overlay "5" at 54,20 h1.52; Bottom Overlay "1" at 53.9,11.3 h1.52; Bottom Overlay "6" at 61.484,20.024 h1.52; Bottom Overlay "4" at 60.7,11.3 h1.52; Bottom Overlay "48" at 63.16,10.5 h1.52; Bottom Overlay "1" at 114.16,15.5 h1.52; Bottom Overlay "U23" at 110.16,18.5 h1.52; Bottom Overlay "U24" at 107.16,59.5 h1.52; Bottom Overlay "47" at 113.16,61.5 h1.52